# Altium PCB PCB1.PcbDoc
Units mil, origin at the board's own origin, x right, y up, seen from the top; angles counter-clockwise.
Board outline 1074.8 x 1117.49 mil, 4 copper layers (Top Layer 1, Top Layer, Bottom Layer, Bottom Layer 1), stack 23.756 mil thick; 53 components, 45 nets, 231 pads, 116 vias.
Unrouted connection lines stored in the file: 1.
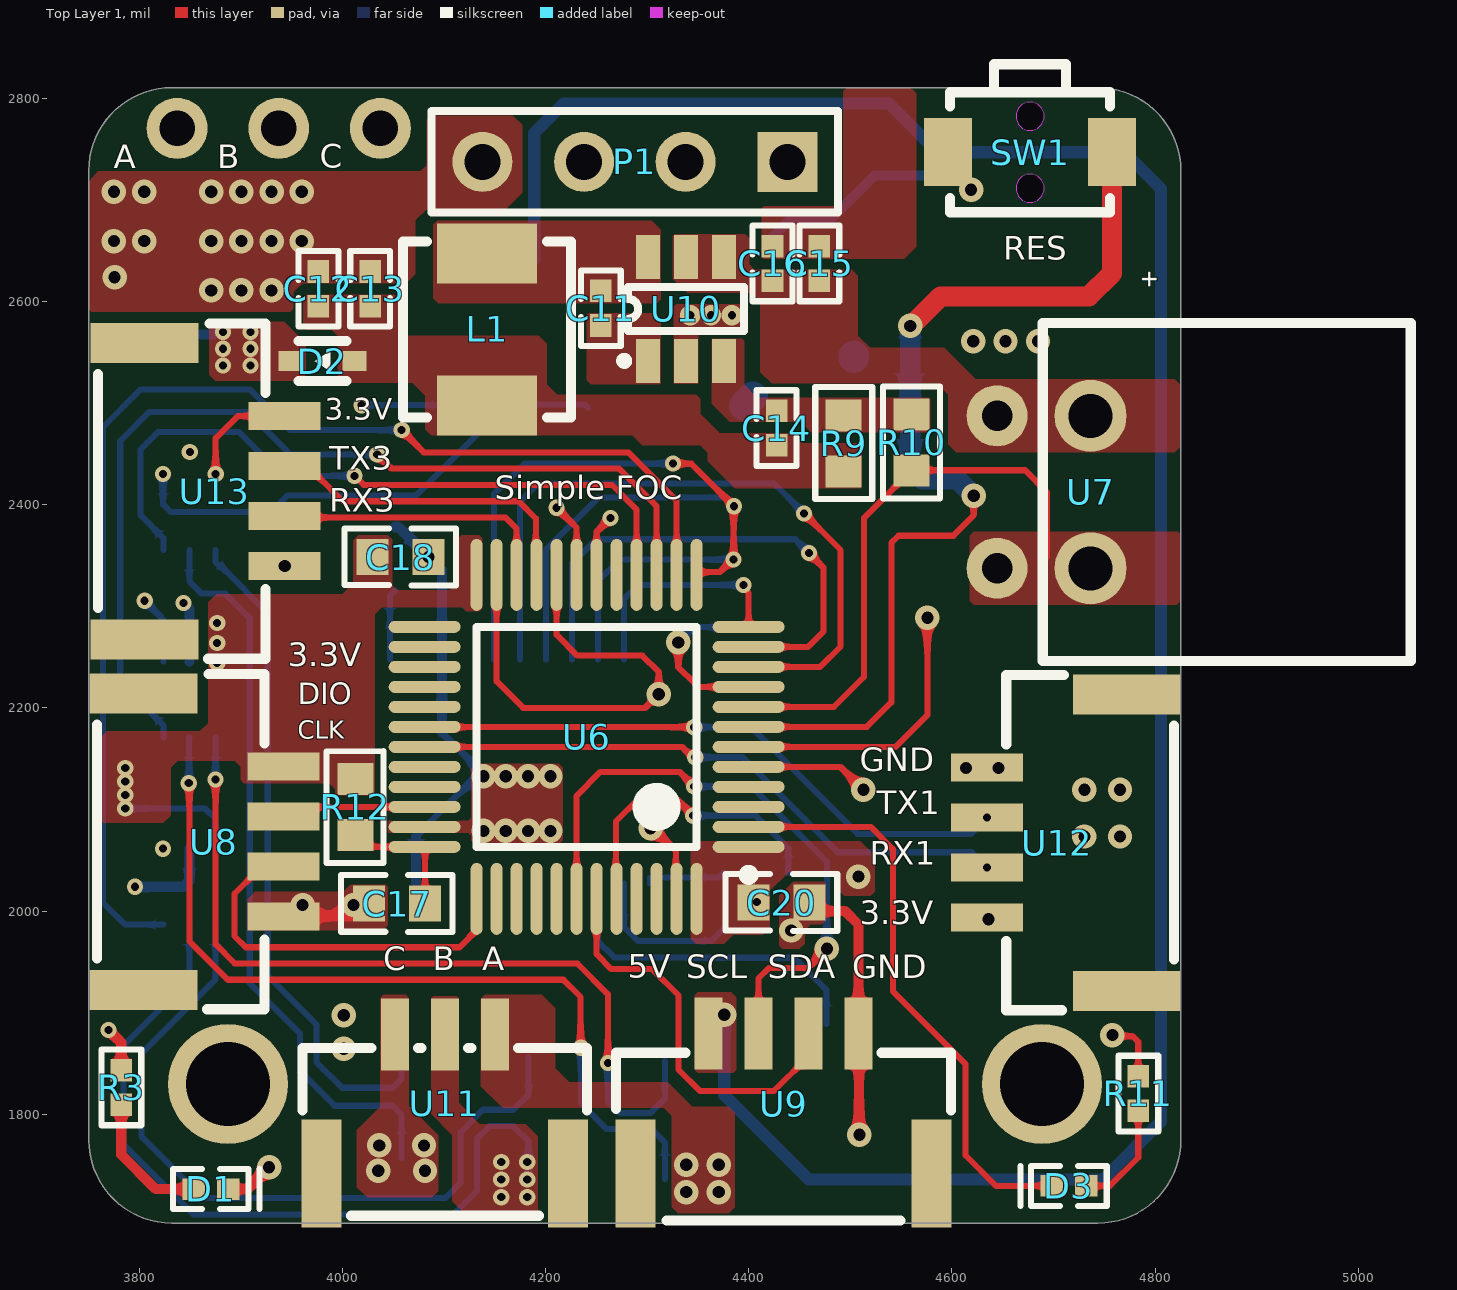
[diagram p0: Top Layer 1 view]
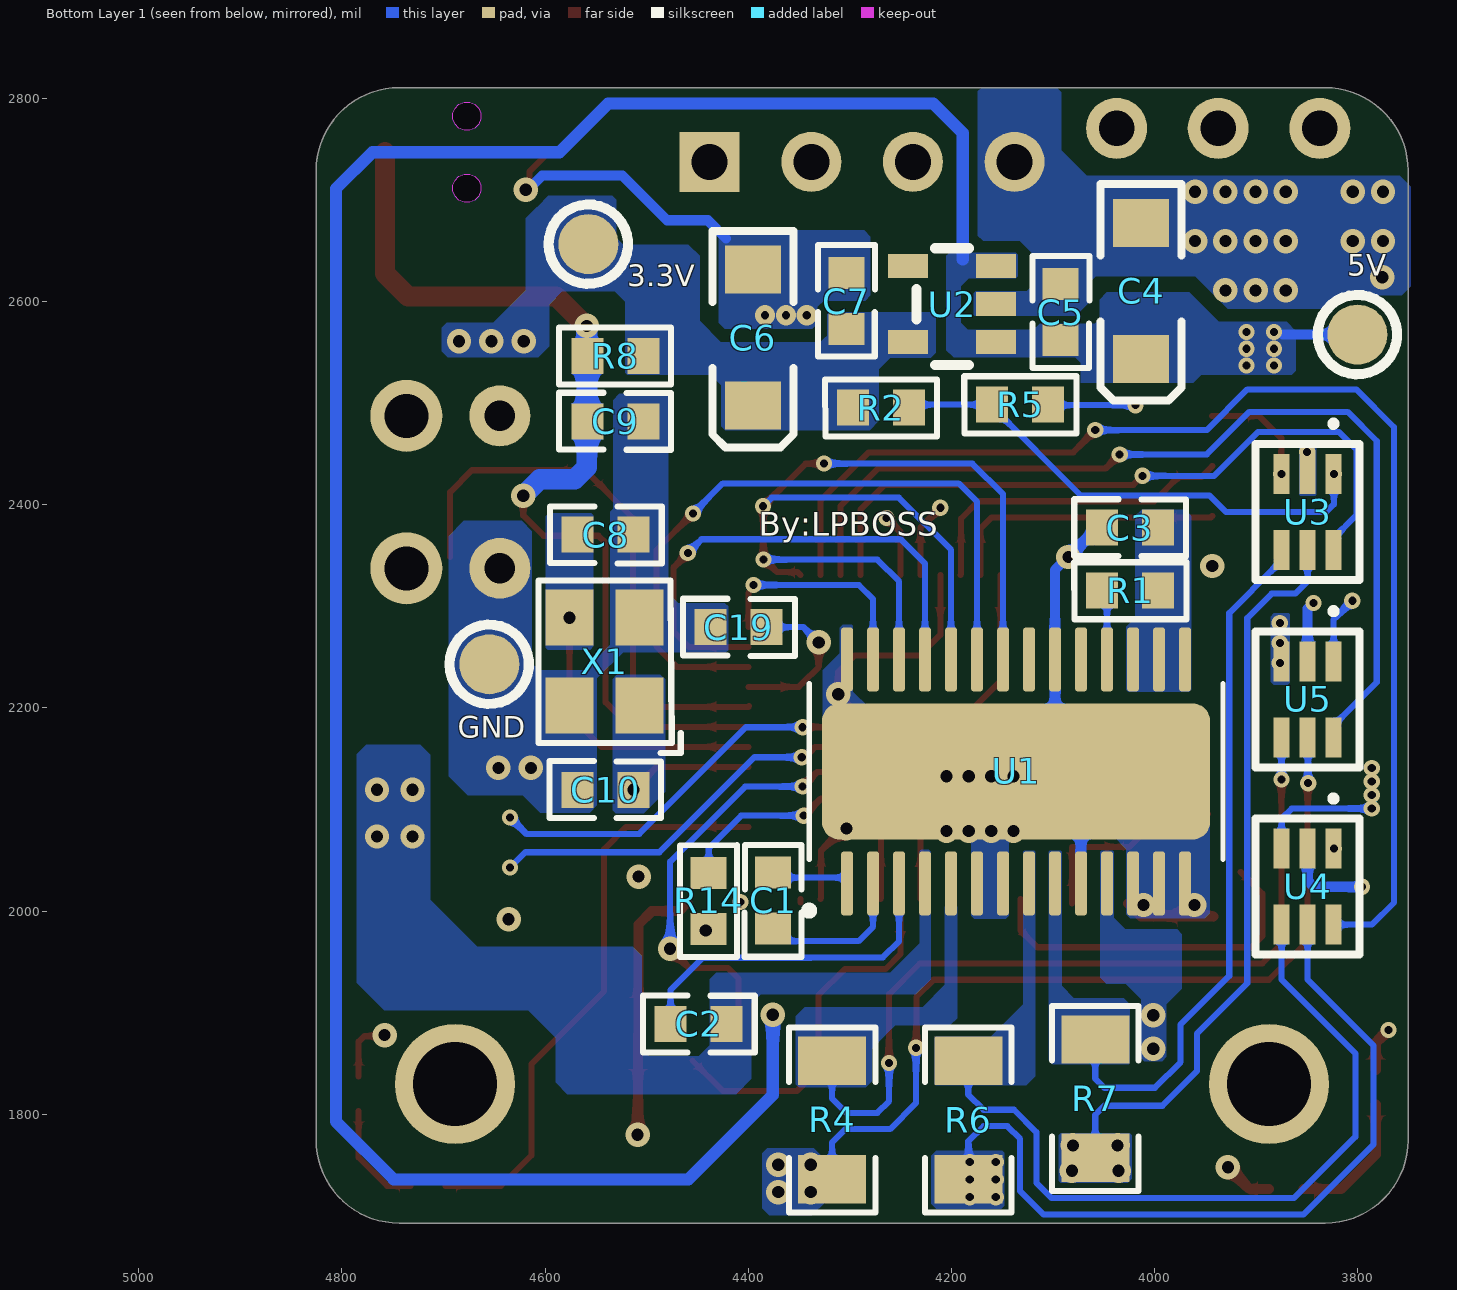
[diagram p1: Bottom Layer 1 view, seen from below]
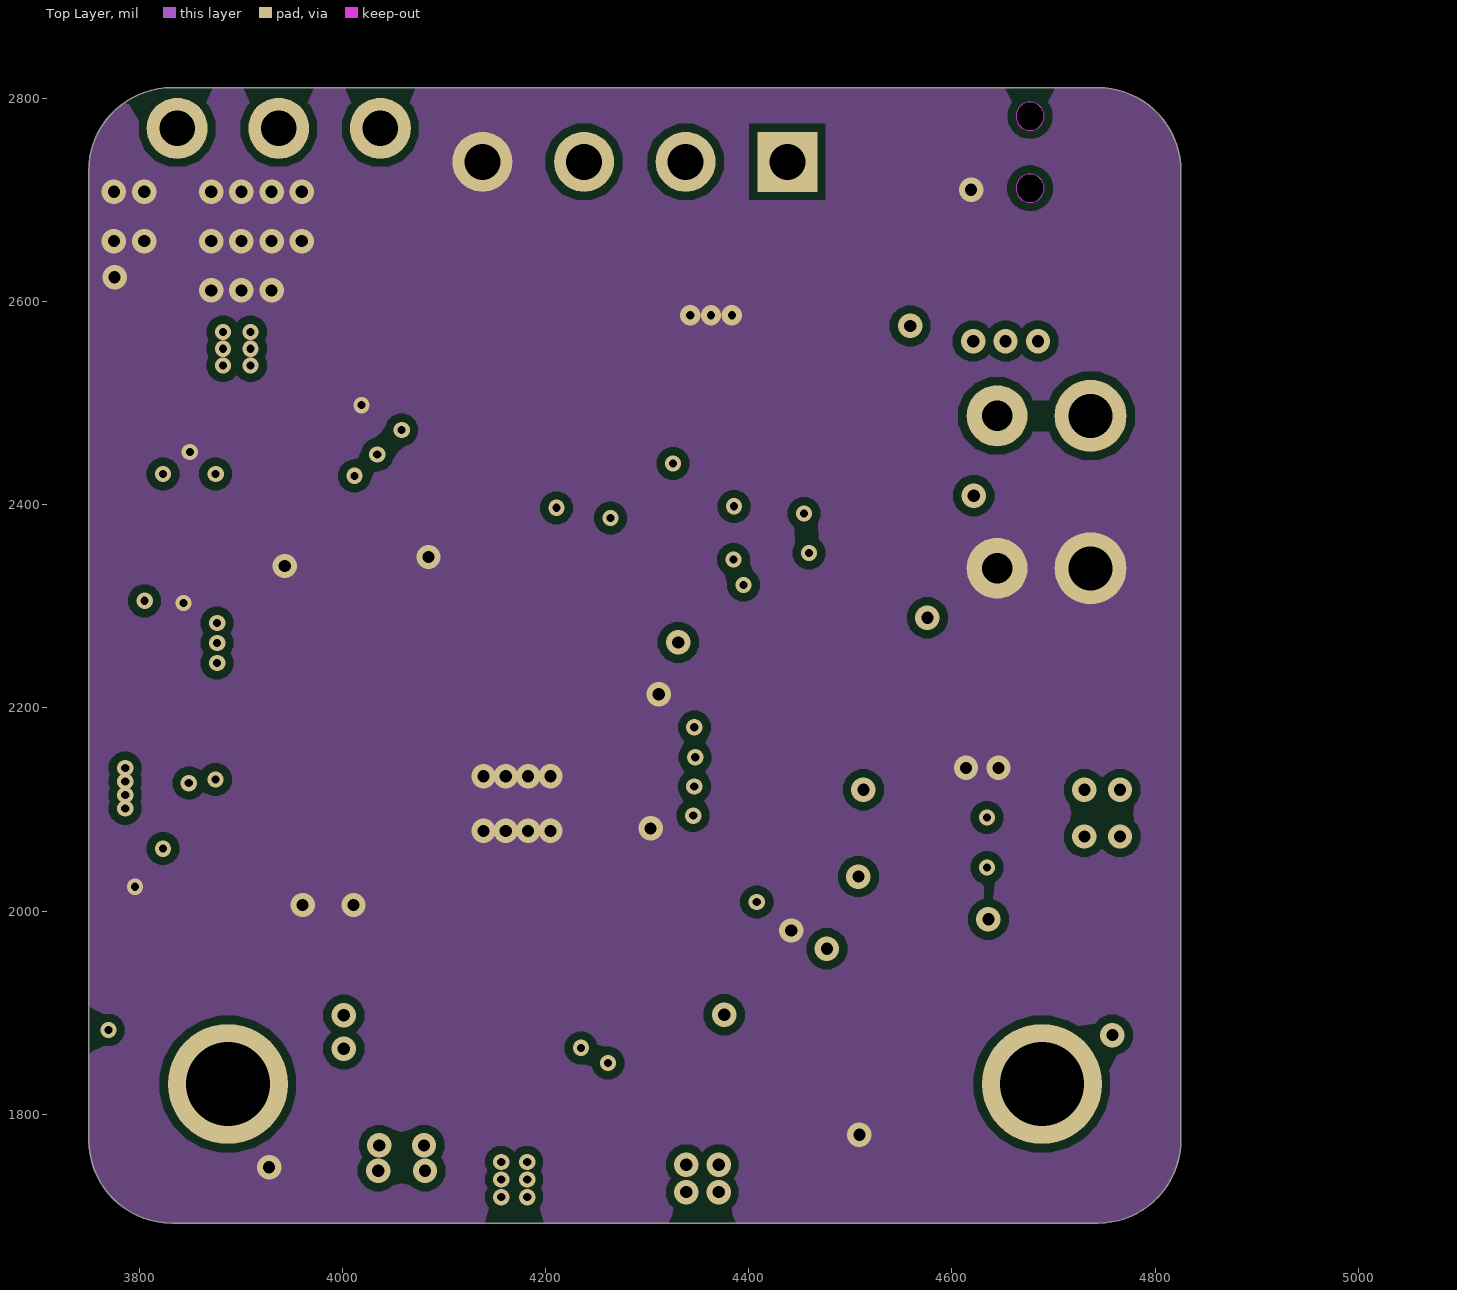
[diagram p2: Top Layer]
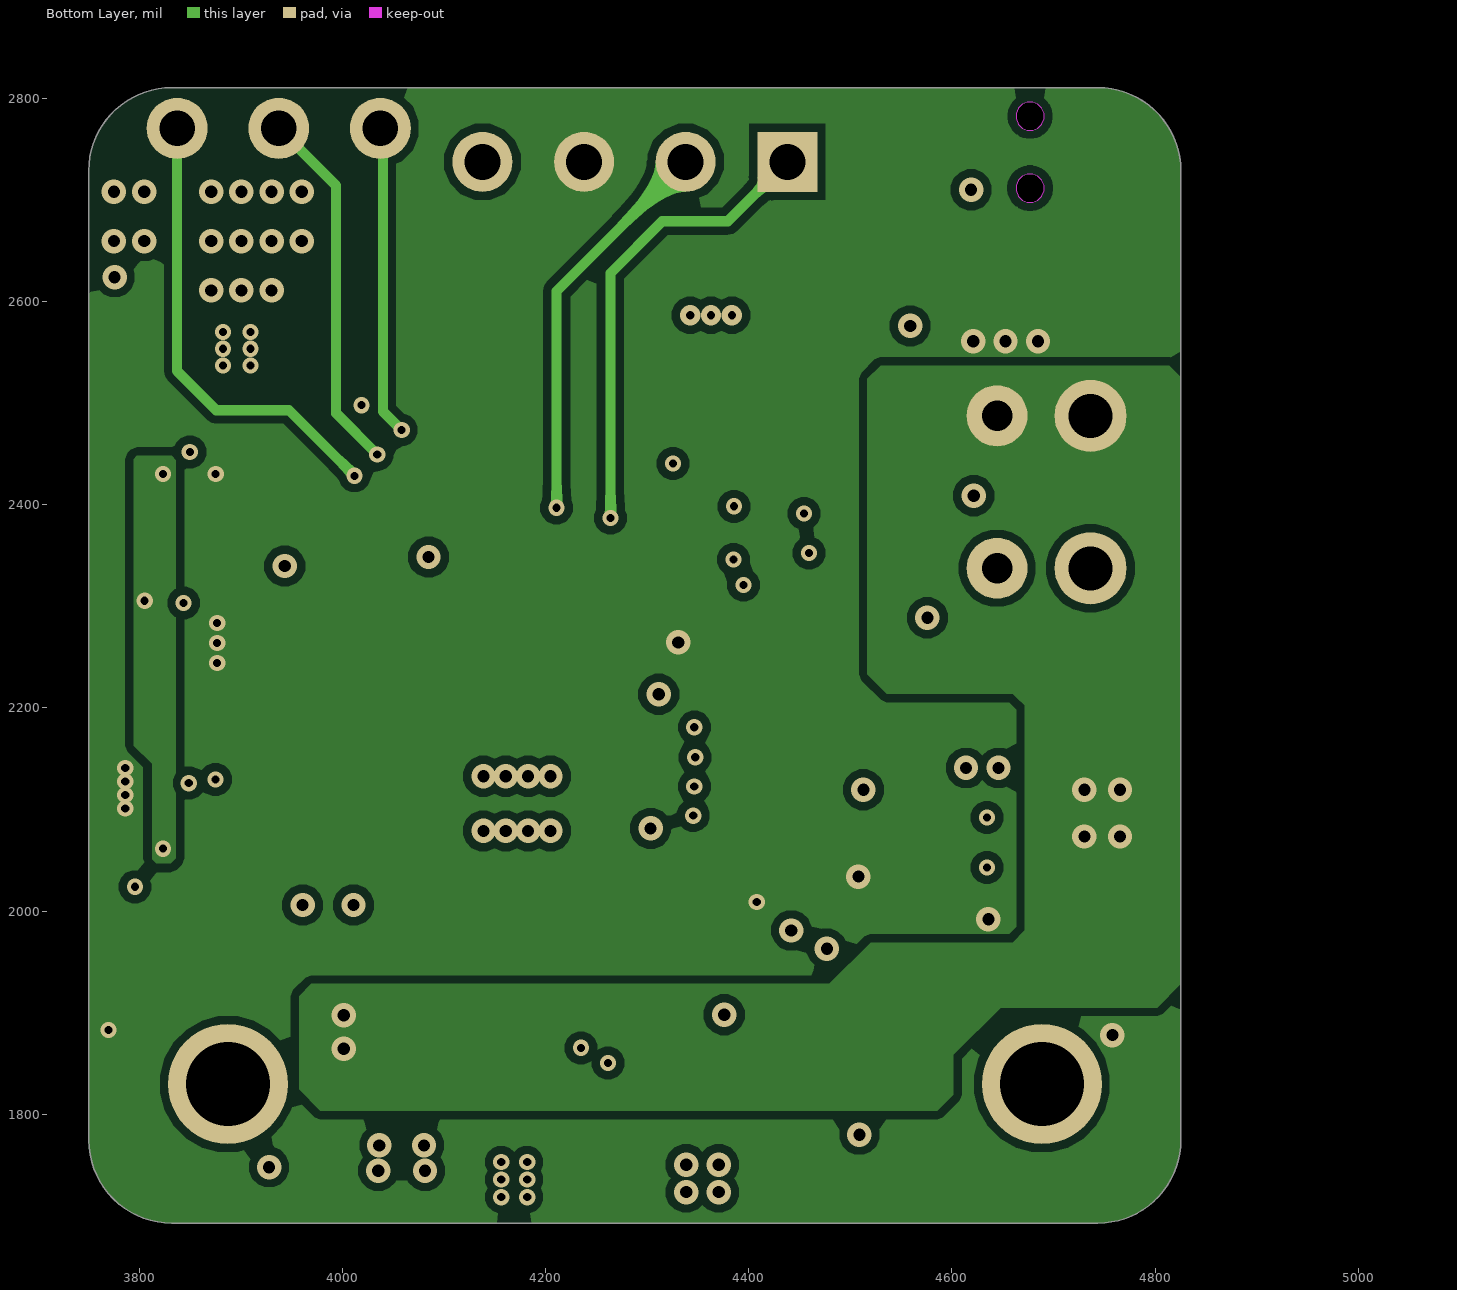
[diagram p3: Bottom Layer]

## Layer stack, top to bottom
Top Solder: solder mask 0.4, Solder Resist, Dk 3.5
Top Layer 1: signal copper 1.378
Dielectric 2: prepreg 2.8, PP-006, Dk 4.1
Top Layer: signal copper 1.4
Dielectric 1: dielectric 12.6, FR-4, Dk 4.8
Bottom Layer: signal copper 1.4
Dielectric 3: prepreg 2.8, PP-006, Dk 4.1
Bottom Layer 1: signal copper 1.378
Bottom Solder: solder mask 0.4, Solder Resist, Dk 3.5

## Board outline
3750.63,1774.69 3750.63,2728.77 cw(c3832.33,2728.77) 3832.33,2810.47 4743.72,2810.47 cw(c4743.72,2728.77) 4825.43,2728.77 4825.43,1774.69 cw(c4743.72,1774.69) 4743.72,1692.99 3832.33,1692.99 cw(c3832.33,1774.69)

## Design rules (kind name [scope] priority, off if disabled: settings)
Clearance [All] p1: gap=8 ignorepadtopadclearanceinfootprint=TRUE
ComponentClearance [All] p1: gap=0 collisioncheckmode=3 verticalgap=0 showdistances=FALSE
PlaneConnect [All] p1: planeconnectstyle=Direct reliefexpansion=20 reliefentries=4 reliefconductorwidth=10 reliefairgap=10
PolygonConnect [All] p1: connectstyle=Direct reliefconductorwidth=10 reliefentries=4 polygonreliefangle="90 Angle" airgapwidth=10
RoutingVias [All] p1: holewidth=28 width=50 viastyle="Through Hole" minholewidth=1 minwidth=1 maxholewidth=28 maxwidth=50
SolderMaskExpansion [All] p1: expansion=4 istentingtop=FALSE
Width [All] p1: maxlimit=100 minlimit=1 preferedwidth=6
28 further rules are at their usual default settings.

## Components (designator, comment, footprint, x,y, rotation, side; value= is the part's Value field where it differs from the comment)
C1 "10nf" C0603 4375.53,2010.47 r90 bottom
C2 "104" C0603 4449,1889 r0 bottom
C3 "0.47uf" C0603 4024.53,2377.47 r0 bottom
C4 "10uF" "CD A(3216)" 4013.53,2610.47 r90 bottom
C5 "104" C0603 4092.53,2589.47 r270 bottom
C6 "10uF" "CD A(3216)" 4395.53,2564.47 r90 bottom
C7 "104" C0603 4303.53,2600.47 r270 bottom
C8 "20pf" C0603 4540.53,2370.47 r0 bottom
C9 "104" C0603 4530.97,2482.03 r180 bottom
C10 "20pf" C0603 4540.53,2119.47 r180 bottom
C11 "104" C0402 4254.53,2593.51 r90 top
C12 "22UF" C0402 3976.53,2612.47 r270 top
C13 "104" C0402 4027.53,2612.47 r270 top
C14 "220pf" C0402 4427.53,2475.47 r270 top
C15 "104" C0402 4469.53,2637.47 r270 top
C16 "22uf" C0402 4423.53,2637.47 r270 top
C17 "104" C0603 4053.97,2007.47 r0 top
C18 "104" C0603 4057.41,2348.54 r0 top
C19 "104" C0603 4409.53,2279.47 r0 bottom
C20 "104" C0603 4432.53,2008.47 r0 top
D1 "LED" LED0402 3868.53,1730.47 r0 top
D2 "Diode" ESC_L1.2-W0.8-LS1.6-RD 3980.53,2541.47 r0 top
D3 "LED" LED0402 4717.53,1725.47 r180 top
L1 "3.3uH" "0402 TPC 4*4*2" 4142.53,2572.64 r90 top
P1 "Header 4" HDR1X4 4438.03,2737.47 r180 top
R1 "1K" R0603 4024.25,2315.47 r0 bottom
R2 "1K" R0603 4269.53,2495.47 r0 bottom
R3 "1K" R0402 3782.53,1826.47 r270 top
R4 "0.01" R1206 4317.53,1794.47 r90 bottom
R5 "1K" R0603 4132.53,2498.47 r0 bottom
R6 "0.01" R1206 4183.53,1794.47 r90 bottom
R7 "0.01" R1206 4058.53,1815.47 r90 bottom
R8 "10K" R0603 4530.97,2546.47 r180 bottom
R9 "73.2K" R0603 4493.53,2460.47 r270 top
R10 "10K" R0603 4560.53,2461.47 r90 top
R11 "1K" R0402 4783.53,1820.47 r270 top
R12 "0" R0603 4012.85,2102.58 r90 top
R14 "10K" R0603 4439,2010.14 r90 bottom
SW1 "Switch" SW-SMD_L3.9-W3.6-LS4.8-EH 4677,2747 r180 top
U1 "DRV8313PWP" HTSSOP-28 4136.53,2137.47 r90 bottom locked
U2 "RT9013-33" SOT-23-5_L2.9-W1.6-P0.95-LS2.8-BR 4199.53,2597.47 r180 bottom
U3 "INA199A1DCKR" SOT363 3849.53,2392.88 r270 bottom
U4 "INA199A1DCKR" SOT363 3849.53,2024.07 r270 bottom
U5 "INA199A1DCKR" SOT363 3849.53,2208.47 r270 bottom
U6 "STM32F103C8T6" 48P 4240.53,2171.47 r180 top locked
U7 "2EDGV-3.81卧式座" 2EDGV-3.81卧式座 4736.53,2412.47 r90 top locked
U8 "GH125-4P" CONN-SMD_4P-P1.27_GH125-S04DCA-00 3873.53,2068.47 r270 top locked
U9 "编码器" CONN-SMD_4P-P1.27_GH125-S04DCA-00 4434.35,1810.58 r0 top locked
U10 "RY8121" SOT-23-6 4338.57,2592.82 r90 top
U11 "GH125-3P" CONN-SMD_3P-P1.27_JS_GH125-S03CCA-00 4101.04,1810.18 r0 top locked
U12 "串口" CONN-SMD_4P-P1.27_GH125-S04DCA-00 4703.53,2067.47 r90 top
U13 "串口" CONN-SMD_4P-P1.27_GH125-S04DCA-00 3874.53,2413.47 r270 top
X1 "XTAL-4" OSC-SMD_4P-L3.2-W2.5-BL 4541.53,2245.47 r90 bottom

## Footprints (in the part's own frame and the unit in brackets; to place one, negate y for a bottom-side part, rotate by r counter-clockwise, add the part's x,y. Pads: shape width x height; smd on the part's side, far side on the other; paste and mask are expansions set on the pad)
2EDGV-3.81卧式座 [mm]
  round 1.8 hole 1.1 mask+0.051: 1(-1.905,0) 2(1.905,0)
  silkscreen extent -4.23,-8.01 4.23,1.19
48P [mm] "stm32f103"
  oval 1.8x0.3 smd: 1(-4.05,2.75) 2(-4.05,2.25) 3(-4.05,1.75) 4(-4.05,1.25) 5(-4.05,0.75) 6(-4.05,0.25) 7(-4.05,-0.25) 8(-4.05,-0.75) 9(-4.05,-1.25) 10(-4.05,-1.75) 11(-4.05,-2.25) 12(-4.05,-2.75) 25(4.05,-2.75) 26(4.05,-2.25) 27(4.05,-1.75) 28(4.05,-1.25) 29(4.05,-0.75) 30(4.05,-0.25) 31(4.05,0.25) 32(4.05,0.75) 33(4.05,1.25) 34(4.05,1.75) 35(4.05,2.25) 36(4.05,2.75)
  oval 0.3x1.8 smd: 13(-2.75,-4.05) 14(-2.25,-4.05) 15(-1.75,-4.05) 16(-1.25,-4.05) 17(-0.75,-4.05) 18(-0.25,-4.05) 19(0.25,-4.05) 20(0.75,-4.05) 21(1.25,-4.05) 22(1.75,-4.05) 23(2.25,-4.05) 24(2.75,-4.05) 37(2.75,4.05) 38(2.25,4.05) 39(1.75,4.05) 40(1.25,4.05) 41(0.75,4.05) 42(0.25,4.05) 43(-0.25,4.05) 44(-0.75,4.05) 45(-1.25,4.05) 46(-1.75,4.05) 47(-2.25,4.05) 48(-2.75,4.05)
  silkscreen extent -4.18,-2.75 2.75,3.57
"0402 TPC 4*4*2" [mm] "4.2mm x 4.4mm x 2mm 一体成型功率电感"
  rect 1.5x2.5 smd: 1(-1.9,0) 2(1.9,0)
  silkscreen extent -2.2,-2.1 2.2,2.1
C0402 [mm]
  rect 0.566x0.54 smd mask+0.051: 1(-0.433,0) 2(0.433,0)
  silkscreen extent -0.94,-0.5 0.94,0.5
C0603 [mm]
  rect 0.8x0.9 smd mask+0.051: 1(-0.7,0) 2(0.7,0)
  silkscreen extent -1.41,-0.71 1.39,0.72
"CD A(3216)" [mm] "常用:钽电容"
  rect 1.2x1.4 smd: 1(-1.7,0) 2(1.7,0)
  silkscreen extent -2.74,-1.02 2.67,1.02, body extent -1.6,-0.8 1.6,0.8, height 1.6
CONN-SMD_3P-P1.27_JS_GH125-S03CCA-00 [mm]
  rect 0.7x1.8 smd paste+0 mask+0.05: 1(-1.25,1.74) 2(0,1.74) 3(1.25,1.74)
  rect 1x2.7 smd paste+0 mask+0.05: 4(3.08,-1.74) 5(-3.08,-1.74)
  silkscreen extent -3.56,-2.79 3.56,1.4
CONN-SMD_4P-P1.27_GH125-S04DCA-00 [mm] "P4"
  rect 0.7x1.8 smd mask+0.05: 1(-1.875,1.75) 2(-0.625,1.75) 3(0.625,1.75) 4(1.875,1.75)
  rect 1x2.7 smd mask+0.05: 5(3.705,-1.75) 6(-3.705,-1.75)
  silkscreen extent -4.19,-2.92 4.19,1.27
ESC_L1.2-W0.8-LS1.6-RD [mil]
  rect 23.6x19.7 smd mask+2: 1(-31.5,0) 2(31.5,0)
  silkscreen extent -24,-20 24,20
HDR1X4 [mm] "Connector; Header; 4 Position"
  rect 1.5x1.5 hole 0.9: 1(0,0)
  round 1.5 hole 0.9: 2(2.54,0) 3(5.08,0) 4(7.62,0)
  silkscreen extent -1.27,-1.27 8.89,1.27, body extent -1.27,-1.27 8.89,1.27, height 5.94
HTSSOP-28 [mm]
  rrect50% 1.6x0.3 smd paste-2 mask+0: 1(-2.8,4.225) 2(-2.8,3.575) 3(-2.8,2.925) 4(-2.8,2.275) 5(-2.8,1.625) 6(-2.8,0.975) 7(-2.8,0.325) 8(-2.8,-0.325) 9(-2.8,-0.975) 10(-2.8,-1.625) 11(-2.8,-2.275) 12(-2.8,-2.925) 13(-2.8,-3.575) 14(-2.8,-4.225) 15(2.8,-4.225) 16(2.8,-3.575) 17(2.8,-2.925) 18(2.8,-2.275) 19(2.8,-1.625) 20(2.8,-0.975) 21(2.8,-0.325) 22(2.8,0.325) 23(2.8,0.975) 24(2.8,1.625) 25(2.8,2.275) 26(2.8,2.925) 27(2.8,3.575) 28(2.8,4.225)
  rrect25% 3.4x9.7 smd paste-6 mask+0: 29(0,0)
  silkscreen extent -3.58,-5.17 2.2,5.27
LED0402 [mm]
  rect 0.566x0.54 smd mask+0.051: A(-0.376,-0.104) N(0.49,-0.104)
  silkscreen extent -0.89,-0.6 1.27,0.39
OSC-SMD_4P-L3.2-W2.5-BL [mm] "贴片晶振"
  rect 1.4x1.2 smd: 1(-1.1,-0.875) 2(1.1,-0.875) 3(1.1,0.875) 4(-1.1,0.875)
  silkscreen extent -2.29,-1.9 2.03,1.65
R0402 [mm]
  rect 0.566x0.54 smd mask+0.051: 1(-0.433,0) 2(0.433,0)
  silkscreen extent -0.94,-0.5 0.94,0.5
R0603 [mm]
  rect 0.8x0.9 smd mask+0.051: 1(-0.7,0) 2(0.7,0)
  silkscreen extent -1.41,-0.71 1.4,0.72
R1206 [mil]
  rect 47.54x66.97 smd paste-3937.01 mask+2: 1(-58.22,0) 2(58.22,0)
  silkscreen extent -91,-42 91,42
SOT363 [mm]
  rect 1x0.4 smd: 1(-0.95,0.65) 2(-0.95,0) 3(-0.95,-0.65) 4(0.95,-0.65) 5(0.95,0) 6(0.95,0.65)
  silkscreen extent -2.23,-1.3 1.7,1.3
SOT-23-5_L2.9-W1.6-P0.95-LS2.8-BR [mil]
  rect 39.4x23.6 smd mask+1.97: 1(43.3,-37.4) 2(43.3,0) 3(43.3,37.4) 4(-43.3,37.4) 5(-43.3,-37.4)
  silkscreen extent -35,-60 17,55
SOT-23-6 [mm] "SOT23, 6-Leads, Body 2.90x2.80mm, Pitch 0.95mm, IPC Medium Density"
  rect 1.1x0.6 smd: 1(-1.3,0.95) 2(-1.3,0) 3(-1.3,-0.95) 4(1.3,-0.95) 5(1.3,0) 6(1.3,0.95)
  silkscreen extent -1.37,-1.45 0.55,1.62
SW-SMD_L3.9-W3.6-LS4.8-EH [mm]
  rect 1.2x1.7 smd: 1(-2.05,0) 2(2.05,0)
  Keep-Out Layer board cut-out: 0.35,-0.9 0.35,-0.83 0.297,-0.702 0.198,-0.603 0.07,-0.55 -0.07,-0.55 -0.198,-0.603 -0.297,-0.702 -0.35,-0.83 -0.35,-0.9 -0.35,-0.97 -0.297,-1.098 -0.198,-1.197 -0.07,-1.25 0.07,-1.25 0.198,-1.197 0.297,-1.098 0.35,-0.97 0.35,-0.9 0.35,-0.9
  Keep-Out Layer board cut-out: 0.35,0.9 0.35,0.97 0.297,1.098 0.198,1.197 0.07,1.25 -0.07,1.25 -0.198,1.197 -0.297,1.098 -0.35,0.97 -0.35,0.9 -0.35,0.83 -0.297,0.702 -0.198,0.603 -0.07,0.55 0.07,0.55 0.198,0.603 0.297,0.702 0.35,0.83 0.35,0.9 0.35,0.9
  silkscreen extent -2,-2.2 2,1.5

## Part data
C1 C2 C3 C5 C7 C8 C9 C10 C11 C12 C13 C14 C15 C16 C17 C18 C19 C20: library part C, "无极性电容", BOM名称=无极性贴片电容, 学习资源=www.ooocke.com, 版权归属=源创客
C4 C6: library part CAP+, "电解电容 10uf  贴片型 钽电容的正极是实物有线的一段", BOM_JLCPCB Part Class="Extended Part", BOM_Manufacturer=ROQANG, BOM_Manufacturer Part=RVT1V100M0405, BOM_Supplier=LCSC, BOM_Supplier Part=C72485, nameAlias=Capacitance, spicePre=C, spiceSymbolName=RVT1V100M0405-C72485
D2: library part 二极管, "Diode 1N series"
L1: library part L, "电感", BOM名称=小功率贴片电感, 学习资源=www.ooocke.com, 版权归属=源创客
P1: "Header, 4-Pin", LatestRevisionDate=17-Jul-2002, LatestRevisionNote="Re-released for DXP Platform.", Publisher="Altium Limited"
R1 R2 R3 R4 R5 R6 R7 R8 R9 R10 R11 R12 R14: library part R, "电阻", BOM名称=贴片电阻, 学习资源=www.ooocke.com, 版权归属=源创客
SW1: "SWITCH"
U1: "65-V max, 3-A peak 3-phase motor driver 28-HTSSOP -40 to 125", Package="HTSSOP-28 Texas Instruments", Availability=Good, MF="Texas Instruments", MP=DRV8313PWP, Price=None, Purchase-URL=https://pricing.snapeda.com/search/part/DRV8313PWP/?ref=eda, SnapEDA_Link=https://www.snapeda.com/parts/DRV8313PWP/Texas%20Instruments/view-part/287728/?ref=snap
U2: "3.3V降压 500mA 最大输入5.5V"
U9 U12 U13: library part GH125-4P
U10: "18V 2A 1MHz Synchronous Step-Down Regulator"
X1: "贴片晶振"

## Free pads (board coordinates)
  round 59.06 smd far side mask+2: 0(3800.53,2567.47) 0(4557.53,2656.47) 0(4655,2243)
  round 118.11 hole 82.68: 2(3887.42,1829.78) 2(4688.63,1829.78)
  round 60 hole 35: 3(3837.53,2770.47) 3(3937.53,2770.47) 3(4037.53,2770.47)
  round 60 hole 30: 4(4644.53,2487.47) 5(4644.53,2337.47)

## Via types
v1: diameter 24, hole 12, Top Layer 1 to Bottom Layer 1, tented both sides, 63 vias
v2: diameter 16, hole 8, Top Layer 1 to Bottom Layer 1, tented both sides, 50 vias
v3: diameter 20, hole 8, Top Layer 1 to Bottom Layer 1, tented both sides, 3 vias

## Nets (pads, with @x,y where several pads share a name; then routed paths per layer and width w, separated by ;. In a path a pad name is that pad's centre, name@x,y a point inside that pad or via, vN(x,y) a via of type N, cw(c..) or ccw(c..) an arc to the next point about the centre after c; other vN are vias at no path point)
3.3V: C6.1 C7.2 C18.1 C19.1 C20.1 P1.3 pad.0@4557.53,2656.47 R2.2 R3.1 R8.2 R11.1 R12.2 U2.5 U3.3 U4.3 U5.3 U6.1 U6.9 U6.24 U6.48 U8.1 U12.1 U13.1 | length 539.5
  Top Layer 1 w6: v2(3875.4,2430.28) 3875.4,2465.4 3897.29,2487.29 U13.1 ; v1(4330.77,2264.47) 4330.77,2240.23 4346.8,2224.2 4350.31,2220.69 U6.9 ; U6.48@4348.79,2008.47 U6.48 ; U12.1 4636,1992.28 v1(4636,1992) ; v1(4758,1878) 4759,1877 4778,1877 4783.53,1871.47 R11.1
  Top Layer 1 w10: v2(3770,1883) 3782.53,1870.47 R3.1
  Bottom Layer 1 w6: v2@3784,2101 3784.5,2101.5 3784.5,2110.5 3785,2111 3785,2108.29 3788.87,2104.42 v2@3788.87,2104 ; v2(3786.41,2101) 3865.35,2101 3875.12,2091.24 U4.3 ; v1(4330.77,2264.47) 4345.77,2279.47 C19.1
  Bottom Layer 1 w30: C6.1 C6.1@4404.15,2506.17 ; R8.2@4503.41,2544.51 R8.2
  other v1: 4508,2034 4621,2561 4652.89,2561 4684.77,2561
  other v2: 4408,2009 3786.41,2114.33 3786.41,2127.67 3786.41,2141 3876.88,2244.32 3876.88,2263.94 3876.88,2283.56
5V: C4.1 C5.2 D2.1 pad.0@3800.53,2567.47 U2.1 U2.3 U9.1 | length 2346.7
  Bottom Layer 1 w10: pad.0@3800.53,2567.47 3873.75,2567.47
  Bottom Layer 1 w12: 4189,2641.28 4189,2765.97 4218.03,2795 4538,2795 4586,2747 4770,2747 4806,2711 4806,1793 4749,1736 4459,1736 4375.96,1819.04 v1(4375.96,1898)
  other v2: 3882.61,2537 3909.61,2537 3882.61,2553.54 3909.61,2553.54 3882.61,2570.08 3909.61,2570.08
+1.65V: R2.1 R5.2 U3.1 U4.1 U5.1 | length 564.9
  Bottom Layer 1 w5.98: 3823.65,2400.35 v2(3823.65,2430.28)
  Bottom Layer 1 w6: v2(3805.53,2305.47) 3823.94,2287.06 U5.1 ; 3823.65,2400.35 3831,2393 3930,2393 3946,2409 4072.58,2409 4160.09,2496.5 R5.2 4238.97,2498.47 R2.1 ; v2(3823.65,2430.28) U3.1
  other v2: 3823.65,2061.47
CS1: pad.3@3837.53,2770.47 U3.6 U6.16 | length 1155.8
  Top Layer 1 w6: v2(4012.17,2428.45) 4021.15,2419.47 4265.53,2419.47 4289.74,2395.26 U6.16
  Bottom Layer w10: pad.3@3837.53,2770.47 3837.53,2531.47 3876,2493 3947.62,2493 v2(4012.17,2428.45)
  Bottom Layer 1 w6: U3.6 3823.94,2367.28 3801.53,2389.69 3801.53,2454.47 3818.53,2471.47 3898.53,2471.47 3941.55,2428.45 v2(4012.17,2428.45)
CS2: pad.3@4037.53,2770.47 U4.6 U6.14 | length 1540.6
  Top Layer 1 w6: v2(4058.53,2473.47) 4058.53,2473.18 4080.23,2451.47 4281.53,2451.47 4329.11,2403.89 U6.14
  Bottom Layer w10: pad.3@4037.53,2770.47 4040,2768 4040,2492 v2(4058.53,2473.47)
  Bottom Layer 1 w6: U4.6 3786.33,1986.67 3764.53,2008.47 3764.53,2476.47 3801.53,2513.47 3908.85,2513.47 3948.85,2473.47 v2(4058.53,2473.47)
CS3: pad.3@3937.53,2770.47 U5.6 U6.15 | length 1316.4
  Top Layer 1 w6: v2(4034.53,2449.47) 4048.53,2435.47 4272.53,2435.47 4309.42,2398.58 U6.15
  Bottom Layer w10: pad.3@3937.53,2770.47 3994,2714 3994,2490 v2(4034.53,2449.47)
  Bottom Layer 1 w6: U5.6 3823.94,2182.88 3781.53,2225.29 3781.53,2462.76 3810.24,2491.47 3906.81,2491.47 3948.81,2449.47 v2(4034.53,2449.47)
DRV_EN: U1.22 U1.24 U1.26 U6.13 | length 1060.6
  Top Layer 1 w6: v2(4325.53,2440.47) 4343.53,2440.47 v2(4385.53,2398.47) 4385.26,2398.21 4385.26,2346.26 v2(4385,2346) 4384.01,2346 4371.62,2333.61 4351.48,2333.61 U6.13
  Bottom Layer 1 w6: U1.22 4149.32,2410.32 4179.47,2440.47 v2(4325.53,2440.47) ; U1.24 4200.5,2355.5 4252,2407 4377,2407 v2(4385.53,2398.47) ; U1.26 4251.68,2324.63 4273.05,2346 v2(4385,2346)
GND: C3.2 C4.2 C5.1 C6.2 C7.1 C8.1 C9.2 C10.1 C12.1 C13.1 C15.1 C16.1 C17.1 C18.2 C19.2 C20.2 D1.N P1.4 pad.0@4655,2243 pad.5 R5.1 R10.1 R14.1 SW1.2 U1.6 U1.7 U1.10 U1.12 U1.13 U1.14 U1.20 U1.28 U1.29 U2.2 U3.2 U4.2 U5.2 U6.8 U6.20 U6.23 U6.35 U6.47 U7.1 U8.4 U9.4 U10.2 U12.4 U13.4 X1.2 X1.4 | length 2470.7
  Top Layer 1 w6: U6.23 4151.94,2226.06 4178,2200 4298.07,2200 v1(4311.53,2213.46) 4311.53,2235.47 4295.53,2251.47 4231.53,2251.47 4211,2272 U6.20 ; v1(4303.53,2081.47) 4306.53,2081.47 4328.33,2059.67 4328.33,2012.8 U6.47 ; U6.8@4399.2,2201.78 U6.8 4484.05,2201 4513.53,2230.47 4513.53,2386.91 R10.1 4672.09,2433.91 4693.53,2412.47 4693.53,2348.47 ; SW1.2 4615.56,2727.73 4615.56,2718.31 4619,2714.87 v1(4619,2710)
  Top Layer 1 w10: D1.N 3906.38,1726.38 v1(3928,1748) ; v1(3961,2006) 3949.65,1994.65 U8.4 4013.59,1994.65 C17.1 ; C20.2 4468.56,2000 4495,2000 4508.17,1986.83 U9.4 4508.58,1879.06 4508.58,1780.42 v1(4509,1780)
  Bottom Layer 1 w6: v2(4019,2498) 4110,2498 R5.1@4111,2499 ; U1.29@4072.55,2073.5 U1.29 U1.29@4098.14,2175.86
  Bottom Layer 1 w10: v2(3796,2024) 3843.67,2024 3849.53,2029.86 U4.2 ; v2(3843.84,2303.29) 3849.53,2297.6 U5.2 ; C3.2 4052.09,2378.47 4055.01,2378.47 v1(4084.97,2348.54) ; U1.10 U1.29@4072.55,2073.5 ; v1@4086,2348 4098.14,2335.86 U1.20 U1.29@4098.14,2175.86 ; 4422,2662 4440,2680 4480,2680 4524,2724 4603,2724 v1@4619,2708
  other v1: 4442,1981 4011.12,2006 4139,2079 4161,2079 4183,2079 4205,2079 4139,2132.75 4161,2132.75 4183,2132.75 4205,2132.75 4614,2141 4646,2141 3943.42,2339.65 3871,2611 3900.75,2611 3930.5,2611 3776,2624 3775.31,2659.5 3805.06,2659.5 3871,2659.5 3900.75,2659.5 3930.5,2659.5 3960.25,2659.5 3775.31,2708 3805.06,2708 3871,2708 3900.75,2708 3930.5,2708 3960.25,2708
  other v2: 3850,2452
  other v3: 4342.53,2586.47 4363.03,2586.47 4383.53,2586.47
LED: D3.N U6.2 | length 579.4
  Top Layer 1 w6: U6.2 4520.22,2082.89 4542,2061.11 4542,1921 4613.53,1849.47 4613.53,1759.47 4643.44,1729.56 D3.N
NetC1_1: C1.1 U1.2 | length 151.8
  Bottom Layer 1 w6: U1.2 4277.27,1984.73 4291.53,1970.47 4363.09,1970.47 C1.1
NetC1_2: C1.2 U1.1 | length 80.5
  Bottom Layer 1 w6: U1.1 4302.97,2027.34 4302.97,2033.03 4370.53,2033.03 C1.2
NetC2_2: C2.2 U1.3 | length 335.1
  Bottom Layer 1 w6: U1.3 4251.68,1970.32 4267.53,1954.47 4338.12,1954.47 4338.43,1954.17 4444.83,1954.17 4476.56,1922.44 C2.2
NetC11_1: C11.1 U10.1
NetC11_2: C11.2 L1.2 U10.6
NetC12_2: C12.2 C13.2 C14.2 D2.2 L1.1 R9.2
NetC14_1: C14.1 R9.1 R10.2 U10.3
NetC17_2: C17.2 R12.1 U6.36 | length 129
  Top Layer 1 w6: R12.1 4024.66,2063.21 U6.36 4081.53,2062.76 C17.2
NetD1_A: D1.A R3.2 | length 134.3
  Top Layer 1 w10: R3.2 3782.53,1760.47 3816.62,1726.38 D1.A
NetD3_A: D3.A R11.2 | length 108.7
  Top Layer 1 w6: D3.A 4755.56,1729.56 4783.53,1757.53 R11.2
NetR1_2: R1.2 U1.18 | length 69.8
  Bottom Layer 1 w6: U1.18 4046.96,2310.62 R1.2
NetR14_2: R14.2 U6.44 | length 300.1
  Top Layer 1 w6: U6.44 4269.27,2012.8 4269.27,2088.22 4291.84,2110.79 4328.68,2110.79 v2(4345.47,2094)
  Bottom Layer 1 w6: v2(4345.47,2094) 4407,2094 4439,2062 R14.2
OLED_SCL: P1.2 U6.19 | length 467.3
  Top Layer 1 w6: v2(4211,2397) 4230.68,2377.32 U6.19
  Bottom Layer w10: v2(4211,2397) 4211,2610.45 P1.2
OLED_SDA: P1.1 U6.18 | length 522
  Top Layer 1 w6: U6.18 4250.37,2373.37 v2(4264,2387)
  Bottom Layer w10: v2@4264,2387.05 4264,2565 4264,2628 4315,2679 4379.55,2679 P1.1
OSCIN: C10.2 U6.5 X1.1 | length 122.3
  Top Layer 1 w6: U6.5 4490.49,2141.95 v1(4512.97,2119.47)
OSCOUT: C8.2 U6.6 X1.3 | length 284.8
  Top Layer 1 w6: U6.6 4544.68,2161.63 4575.98,2192.93 v1(4575.98,2288.78)
OUT1: R4.1 U5.5 U11.3 | length 849.6
  Top Layer 1 w6: v2(3849,2126) 3849.53,2125.47 3849.53,1970.47 3887.53,1932.47 4217.67,1932.47 4234.53,1915.62 v2@4234.53,1863.93
  Bottom Layer 1 w6: v2(3849,2126) 3849.26,2126.26 3849.26,2170.81 U5.5 ; v2(4235.01,1865.47) 4235.01,1810.99 4260.53,1785.47 4304.53,1785.47 4317.53,1772.47 R4.1
  other v1: 4338.53,1723.47 4370.53,1723.47 4338.53,1750.47 4370.53,1750.47
OUT1_CS: R4.2 U1.5 U5.4 | length 820
  Top Layer 1 w6: v2(3875.35,2129.47) 3875.35,1967.27 3894.15,1948.47 4231.37,1948.47 4261.53,1918.32 v2@4261.53,1849.83
  Bottom Layer 1 w6: U5.4 3875.24,2170.95 3875.24,2129.59 v2(3875.35,2129.47) ; v2(4261.53,1850.47) 4261.53,1813.1 4273.15,1801.47 4303.53,1801.47 4317.53,1815.47 R4.2
OUT2: R6.1 U4.5 U11.2 | length 780.3
  Bottom Layer 1 w6: U4.5 3849.53,1932.53 3784.53,1867.53 3784.53,1770.47 3853.53,1701.47 4109.53,1701.47 4132.53,1724.47 4132.53,1775.85 4145.15,1788.47 4168.53,1788.47 4183.53,1773.47 R6.1
  other v2: 4156.5,1718.47 4182.06,1718.47 4156.5,1735.78 4182.06,1735.78 4156.5,1753.09 4182.06,1753.09
OUT2_CS: R6.2 U1.8 U4.4 | length 753.5
  Bottom Layer 1 w6: U4.4 3875.12,1932.66 3802.53,1860.07 3802.53,1777.93 3862.98,1717.47 4101.53,1717.47 4116.53,1732.47 4116.53,1782.47 4138.53,1804.47 4168.53,1804.47 4183.53,1819.47 R6.2@4183.53,1856.54
OUT3: R7.1 U3.5 U11.1 | length 731.9
  Bottom Layer 1 w6: U3.5 3849.53,2324.47 3861.53,2312.47 3884.9,2312.47 3909,2288.37 3909,1929 3958.53,1879.47 3958.53,1842.47 3992.53,1808.47 4049.53,1808.47 4058.53,1799.47 R7.1
  other v1: 4035.53,1744.47 4081.53,1744.47 4036.53,1769.47 4080.53,1769.47
OUT3_CS: R7.2 U1.9 U3.4 | length 682.7
  Bottom Layer 1 w6: U3.4 3875.12,2343.66 3879.99,2338.79 3881.21,2338.79 3926.68,2293.32 3926.68,1936.32 3974.53,1888.47 3974.53,1851.47 3999.85,1826.15 4049.53,1826.15 4058.53,1835.15 R7.2
PWM_A: U1.27 U6.12 | length 226.1
  Top Layer 1 w6: v2(4395,2321) 4395,2318.29 4399.98,2313.32 U6.12
  Bottom Layer 1 w6: U1.27 4277.27,2306.96 4291.32,2321 v2(4395,2321)
PWM_B: U1.25 U6.11 | length 506.2
  Top Layer 1 w6: U6.11 4458.48,2260.06 4473.53,2275.1 4473.53,2338.19 4459.53,2352.19 v2(4459.53,2352.47)
  Bottom Layer 1 w6: U1.25 4226.09,2342.04 4250.05,2366 4446,2366 v2(4459.53,2352.47)
PWM_C: U1.23 U6.10 | length 699.3
  Top Layer 1 w6: U6.10 4470.42,2240.37 4490.53,2260.47 4490.53,2355.47 v2(4454.53,2391.47)
  Bottom Layer 1 w6: U1.23 4174.91,2402.91 4193,2421 4425,2421 v2(4454.53,2391.47)
RES: C9.1 R8.1 SW1.1 U6.7 | length 971.9
  Top Layer 1 w6: U6.7 4516.37,2181.32 4540.53,2205.47 4540.53,2362.47 4547.53,2369.47 4601.53,2369.47 4621.53,2389.47 v1(4621.53,2408.91)
  Top Layer 1 w20: v1(4559,2576) 4560.08,2576 4589.08,2605 4735,2605 4757.71,2627.71 SW1.1
  Bottom Layer 1 w20: v1(4559,2576) 4559,2436.72 4570.72,2425 4605.44,2425 v1(4621.53,2408.91)
Sensor_SCL: U6.42 U9.2 | length 613.5
  Top Layer 1 w6: U6.42 4230.68,2113.52 4254.17,2137 4332.17,2137 v2(4346.55,2122.62) ; U9.2 4409.74,1933.74 4420,1944 4458,1944 v1(4477,1963)
  Bottom Layer 1 w6: v2(4346.55,2122.62) 4403.1,2122.62 4477,2048.72 v1(4477,1963)
Sensor_SDA: U6.43 U9.3 | length 370
  Top Layer 1 w6: U6.43 4250.37,1957.63 4265,1943 4305,1943 4331,1917 4331,1844 4352,1823 4425,1823 U9.3@4455,1853
SWCLK: U6.37 U8.3 | length 352.4
  Top Layer 1 w6: U8.3@3915.38,2038.47 3893.99,2017.08 3893.99,1975.49 3905.01,1964.47 4115.53,1964.47 4132.26,1981.21 U6.37
SWDIO: U6.34 U8.2 | length 136.5
  Top Layer 1 w6: U8.2@3947.53,2095.47 3954.63,2102.58 U6.34
USART1_RXD: U6.31 U12.2 | length 602.7
  Top Layer 1 w6: U6.31 4334.53,2161.63 4344.73,2151.43 v2(4347.43,2151.43)
  Bottom Layer 1 w6: v2(4347.43,2151.43) 4394.09,2151.43 4487.52,2058 4619.49,2058 v2(4634.63,2042.86)
USART1_TXD: U6.30 U12.3 | length 603.8
  Top Layer 1 w6: U6.30 4081.24,2181.16 4346.39,2181.16 v2(4346.54,2181)
  Bottom Layer 1 w6: v2(4346.54,2181) 4402.42,2181 4507.42,2076 4618.55,2076 v2(4634.63,2092.08)
USART3_RXD: U6.22 U13.3 | length 278.8
  Top Layer 1 w6: U13.3 3944.81,2387.47 4160.53,2387.47 4171.63,2376.37 U6.22
USART3_TXD: U6.21 U13.2 | length 324.4
  Top Layer 1 w6: U13.2 3954.2,2427.3 3976.7,2427.3 4000.53,2403.47 4173.53,2403.47 4190.53,2386.47 4190.53,2331.7 U6.21
V3P3: C3.1 R1.1 U1.15 U1.16 U1.17
VM: C2.1 C15.2 C16.2 pad.4 U1.4 U1.11 U7.2 U10.4 U10.5
  other v1: 4001.53,1864.47 4001.53,1897.47 4730.53,2073.47 4765.53,2073.47 4730.53,2119.47 4765.53,2119.47
pads on no net: U1.19 U1.21 U2.4 U6.3 U6.4 U6.17 U6.25 U6.26 U6.27 U6.28 U6.29 U6.32 U6.33 U6.38 U6.39 U6.40 U6.41 U6.45 U6.46 U8.5 U8.6 U9.5 U9.6 U11.4 U11.5 U12.5 U12.6 U13.5 U13.6

## Polygon pours and split planes (outlines as drawn)
GND on Bottom Layer 1 "NONET_L-01_P-001" (solid, pour order 61): 3964,2629 3928,2593 3834,2593 3821,2606 3757,2606 3748,2615 3748,2713 3759,2724 4067,2724 4092,2749 4092,2806 4097,2811 4170,2811 4174,2807 4174,2665 4169,2660 4133,2660 4121,2648 4061,2648 4045,2664
3.3V on Bottom Layer 1 "NONET_L-01_P-001" (solid, pour order 57): 4522,2610 4583,2610 4596,2597 4596,2556 4607,2545 4696,2545 4702,2551 4702,2574 4697,2579 4651,2579 4619,2611 4619,2682 4597,2704 4534,2704 4530,2700 4530,2663 4523,2656 4459,2656 4448,2645 4448,2629
GND on Bottom Layer 1 "NONET_L-01_P-001" (solid, pour order 39): 4420,2257 4422,2255 4523,2255 4549,2229 4549,2104 4556,2097 4605,2097 4622,2114 4676,2114 4695,2133 4695,2369 4680,2384 4623,2384 4613,2374 4613,2244 4606,2237 4561,2237 4536,2262 4536,2393 4530,2399 4482,2399 4479,2396 4479,2313 4469,2303 4423,2303 4420,2300
VM on Bottom Layer 1 "NONET_L-01_P-001" (solid, pour order 19): 4723,2164 4776,2164 4785.53,2154.47 4785.53,1929.47 4758.53,1902.47 4616.53,1902.47 4589.53,1875.47 4589.53,1831.53 4578,1820 4412,1820 4397,1835 4397,1872 4434,1872 4449,1857 4498,1857 4505,1864 4505,1956 4514,1965 4667,1965 4713,2011 4713,2154
OUT1_CS on Bottom Layer 1 "NONET_L-01_P-001" (solid, pour order 8): 4353.47,1896.53 4344.53,1905.47 4228.53,1905.47 4206.53,1927.47 4206.53,2004.47 4205.53,2005.47 4195.53,2005.47 4194.53,2004.47 4194.53,1894.47 4201.53,1887.47 4255.53,1887.47 4278.53,1864.47 4278.53,1832.47 4284.53,1826.47 4350.47,1826.47 4353.47,1829.47
3.3V on Bottom Layer 1 "NONET_L-01_P-001" (solid, pour order 55): 4426.53,2517.47 4437.05,2528 4519,2528 4521,2530 4521,2600 4557.53,2636.53 4557.53,2656.47 4529.47,2656.47 4516,2643 4462,2643 4448,2629 4448,2581 4427,2560 4329,2560 4318,2571 4312,2565 4312,2501
3.3V on Bottom Layer 1 "NONET_L-01_P-001" (solid, pour order 54): 3867,2225 3869,2223 3883,2223 3886,2226 3886,2290 3883,2293 3868,2293 3867,2292
OUT2 on Bottom Layer 1 "NONET_L-01_P-001" (solid, pour order 49): 4148,1710 4151,1707 4215,1707 4220,1712 4220,1759 4215,1764 4150,1764 4148,1762
GND on Bottom Layer 1 "NONET_L-01_P-001" (solid, pour order 45): 3841,2460 3843,2462 3855,2462 3858,2459 3858,2410 3857,2409 3842,2409 3841,2410
5V on Bottom Layer 1 "NONET_L-01_P-001" (solid, pour order 30): 3962,2605 3962,2520 4073,2520 4073,2540 4078,2545 4198,2545 4205,2552 4205,2645 4202,2648 4137,2648 4135,2646 4135,2625 4137,2623 4183,2623 4191,2615 4191,2579 4184,2572 4119,2572 4113,2578 4059,2578 4054,2583 4054,2602 4047,2609 3966,2609
V3P3 on Bottom Layer 1 "NONET_L-01_P-001" (solid, pour order 44): 3964,2389 3970,2395 4013,2395 4019,2389 4019,2289 4028,2280 4028,2218 4026,2216 3966,2216 3964,2218
GND on Bottom Layer 1 "NONET_L-01_P-001" (solid, pour order 43): 4280,2606 4285,2601 4326,2601 4332,2595 4332,2578 4337,2573 4423,2573 4429,2579 4429,2668.95 4427.94,2670 4286,2670 4280,2664
GND on Bottom Layer 1 "NONET_L-01_P-001" (solid, pour order 42): 3750.63,2625 4058,2625 4066,2617 4066,2598 4078,2586 4177,2586 4178,2587 4178,2608 4176,2610 4126,2610 4121,2615 4121,2697 4114,2704 3750.63,2704
GND on Bottom Layer 1 "NONET_L-01_P-001" (solid, pour order 41): 4479,2396 4479,2507 4481,2509 4527,2509 4533,2503 4533,2393.16
GND on Bottom Layer 1 "NONET_L-01_P-001" (solid, pour order 38): 4297,2216 4282,2201 4294,2189 4327,2189 4327,2237 4310,2254 4310,2279 4307,2282 4298,2282 4297,2281
GND on Bottom Layer 1 "NONET_L-01_P-001" (solid, pour order 37): 3946,2103 3946,1998 3951,1993 4024,1993 4028,1997 4028,2061 4041,2074
5V on Bottom Layer 1 "NONET_L-01_P-001" (solid, pour order 31): 3954,2528 3962,2520 3962,2605 3937,2580 3870,2580 3861,2571 3861,2532 3865,2528
3.3V on Bottom Layer 1 "NONET_L-01_P-001" (solid, pour order 29): 4422.53,2473.47 4280.53,2473.47 4271.53,2482.47 4271.53,2533.47 4260.53,2544.47 4220.53,2544.47 4215.53,2549.47 4215.53,2586.47 4218.53,2589.47 4320.53,2589.47 4322.53,2587.47 4322.53,2538.47 4339.53,2521.47 4422.53,2521.47 4426.53,2517.47 4426.53,2477.47
VM on Bottom Layer 1 "NONET_L-01_P-001" (solid, pour order 28): 4053.53,2058.47 4052.53,2059.47 4041.53,2059.47 4040.53,2058.47 4040.53,1993.47 4029.05,1982 3978.05,1982 3973.53,1977.47 3973.53,1923.47 3988.53,1908.47 3988.53,1856.47 3992.53,1852.47 4010.53,1852.47 4013.53,1855.47 4013.53,1913.47 4028.53,1928.47 4047.53,1928.47 4053.53,1934.47
VM on Bottom Layer 1 "NONET_L-01_P-001" (solid, pour order 18): 4438,1933 4431.53,1939.47 4260.53,1939.47 4231.53,1968.47 4231.53,2059.47 4230.53,2060.47 4222.53,2060.47 4220.53,2058.47 4220.53,1932.47 4235,1918 4388,1918 4397,1909 4397,1835 4408.53,1823.47 4438,1823.47
GND on Bottom Layer 1 "NONET_L-01_P-001" (solid, pour order 11): 4180.53,2066.47 4189.53,2075.47 4135.53,2075.47 4143.53,2067.47 4143.53,1995.47 4146.53,1992.47 4177.53,1992.47 4180.53,1995.47
OUT3_CS on Bottom Layer 1 "NONET_L-01_P-001" (solid, pour order 10): 4103.53,2059.47 4092.53,2059.47 4091.53,2058.47 4091.53,1926.47 4079.53,1914.47 4030.53,1914.47 4024.53,1908.47 4024.53,1850.47 4025.53,1849.47 4100.53,1849.47 4104.53,1853.47 4104.53,1971.47 4104.53,2058.47
OUT2_CS on Bottom Layer 1 "NONET_L-01_P-001" (solid, pour order 9): 4216.53,1875.47 4215.53,1876.47 4161.53,1876.47 4129.53,1908.47 4129.53,2058.47 4128.53,2059.47 4118.53,2059.47 4117.53,2058.47 4117.53,1837.47 4126.53,1828.47 4215.53,1828.47 4216.53,1829.47
OSCOUT on Bottom Layer 1 "NONET_L-01_P-001" (solid, pour order 7): 4599.53,2388.47 4596.53,2391.47 4554.53,2391.47 4552.53,2389.47 4552.53,2260.47 4555.53,2257.47 4597.53,2257.47 4599.53,2259.47
OSCIN on Bottom Layer 1 "NONET_L-01_P-001" (solid, pour order 6): 4533.53,2228.47 4529.53,2232.47 4486.47,2232.47 4482,2228 4482,2102 4487.53,2096.47 4530.53,2096.47 4533.53,2099.47
OUT3 on Bottom Layer 1 "NONET_L-01_P-001" (solid, pour order 2): 4094.53,1779.47 4092.53,1781.47 4024.53,1781.47 4022.53,1779.47 4022.53,1736.47 4026.53,1732.47 4092.53,1732.47 4094.53,1734.47
OUT1 on Bottom Layer 1 "NONET_L-01_P-001" (solid, pour order 0): 4386.53,1761.47 4381.53,1766.47 4335.53,1766.47 4324.53,1755.47 4324.53,1713.47 4337.53,1700.47 4379.53,1700.47 4386.53,1707.47
GND on Top Layer 1 "NONET_L-01_P-001" (solid, pour order 60): 3958,2728 4077,2728 4083,2734 4083,2778 4088,2783 4168,2783 4177,2774 4177,2707 4161,2691 4083,2691 4072,2680 4072,2627 4063,2618 4026,2618 4020,2624 3922,2624
GND on Top Layer 1 "NONET_L-01_P-001" (solid, pour order 59): 3753,2590 3949,2590 3952,2593 3952,2609 3964,2621 3964,2723 3959,2728 3760,2728 3751,2719 3751,2592
3.3V on Top Layer 1 "NONET_L-01_P-001" (solid, pour order 58): 4343,2043 4343,2065 4347,2069 4510,2069 4524,2055 4524,2019 4520,2015 4494,2015 4488,2021 4488,2034 4483,2039 4440,2039 4419,2018
5V on Top Layer 1 "NONET_L-01_P-001" (solid, pour order 56): 4347,1844 4350,1841 4385,1841 4388,1844 4388,1915 4383,1920 4350,1920 4347,1917
GND on Top Layer 1 "NONET_L-01_P-001" (solid, pour order 53): 4124,2089 4127,2092 4127,2140 4132,2145 4213,2145 4217,2141 4217,2070 4214,2067 4130,2067 4127,2070 4127,2074 4124,2077 4046,2077 4045,2078 4045,2088 4046,2089
GND on Top Layer 1 "NONET_L-01_P-001" (solid, pour order 52): 3907,2012 3914,2019 4001,2019 4008,2026 4043,2026 4045,2024 4045,1986 4040,1981 3907,1981
3.3V on Top Layer 1 "NONET_L-01_P-001" (solid, pour order 51): 3760,2092 3765,2087 3824,2087 3831,2094 3831,2141 3838,2148 3894,2148 3900,2142 3900,2129 3903,2126 3987,2126 3993,2120 3993,2115 3994,2114 4031,2114 4032,2115 4032,2292 4039,2299 4118,2299 4122,2295 4135,2295 4138,2298 4138,2367 4135,2370 4117,2370 4114,2367 4114,2324 4106,2316 4054,2316 4049,2321 4049,2366 4045,2370 4016,2370 4011,2365 4011,2323 4000,2312 3876,2312 3868,2304 3868,2185 3860,2177 3768,2177 3760,2169
GND on Top Layer 1 "NONET_L-01_P-001" (solid, pour order 50): 4430,2015 4444,2029 4474,2029 4476,2027 4476,1991 4472,1987 4461,1987 4455,1981 4455,1968 4450,1963 4433,1963 4430,1966
3.3V on Top Layer 1 "NONET_L-01_P-001" (solid, pour order 47): 4348,1968 4376,1968 4385,1977 4414,1977 4421,1984 4421,2027.97 4400.97,2048 4348,2048 4343,2043 4343,1973
GND on Top Layer 1 "NONET_L-01_P-001" (solid, pour order 46): 3958,2618 4039,2618 4042,2621 4042,2671 4036,2677 3962,2677 3958,2673
GND on Top Layer 1 "NONET_L-01_P-001" (solid, pour order 36): 4413,2644 4415,2642 4553,2642 4565,2654 4565,2805 4559.53,2810.47 4496.47,2810.47 4493,2807 4493,2697 4490,2694 4415,2694 4413,2692
5V on Top Layer 1 "NONET_L-01_P-001" (solid, pour order 32): 3869,2528 3875,2522 3958,2522 3964,2528 3964,2559 3943,2580 3876,2580 3869,2573
GND on Top Layer 1 "NONET_L-01_P-001" (solid, pour order 26): 4350.53,2570.47 4354.53,2574.47 4393.53,2574.47 4395.53,2576.47 4395.53,2596.47 4394.53,2597.47 4328.53,2597.47 4326.53,2595.47 4326.53,2519.47 4327,2519 4350,2519 4350.53,2519.53
NetC11_2 on Top Layer 1 "NONET_L-01_P-001" (solid, pour order 25): 4313.53,2670.47 4304.53,2679.47 4093.53,2679.47 4089.53,2675.47 4089.53,2603.47 4094.53,2598.47 4309.53,2598.47 4313.53,2602.47
NetC11_1 on Top Layer 1 "NONET_L-01_P-001" (solid, pour order 24): 4313.53,2583.47 4308.53,2588.47 4242.53,2588.47 4240.53,2586.47 4240.53,2522.47 4244.53,2518.47 4312.53,2518.47 4313.53,2519.47
NetC12_2 on Top Layer 1 "NONET_L-01_P-001" (solid, pour order 23): 4511.53,2459.47 4510.53,2460.47 4452.53,2460.47 4442.53,2470.47 4371.53,2470.47 4352.53,2489.47 4352.53,2504.47 4348.53,2508.47 4211.53,2508.47 4201.53,2518.47 4201.53,2558.47 4193.53,2566.47 4061.53,2566.47 4055.53,2572.47 4055.53,2602.47 4051.53,2606.47 3964.53,2606.47 3961.53,2603.47 3961.53,2576.57 3965.63,2572.47 3989.53,2572.47 3995.53,2566.47 3995.53,2522.89 3998.41,2520 4069,2520 4081.53,2507.47 4081.53,2474.47 4087.53,2468.47 4285.53,2468.47 4295.53,2458.47 4352.53,2458.47 4360,2451 4360,2443 4386.53,2416.47 4510.53,2416.47 4511.53,2417.47
NetC14_1 on Top Layer 1 "NONET_L-01_P-001" (solid, pour order 22): 4578.53,2504.47 4577.53,2505.47 4408.53,2505.47 4395.53,2518.47 4395.53,2561.47 4393.53,2563.47 4364.53,2563.47 4363.53,2562.47 4363.53,2499.47 4381.53,2481.47 4451.53,2481.47 4461.53,2471.47 4577.53,2471.47 4578.53,2472.47
VM on Top Layer 1 "NONET_L-01_P-001" (solid, pour order 21): 4623.53,2523.47 4592.53,2554.47 4519.53,2554.47 4507.53,2566.47 4507.53,2625.47 4501.53,2631.47 4405.53,2631.47 4400.53,2636.47 4400.53,2662.47 4396.53,2666.47 4327.53,2666.47 4325.53,2664.47 4325.53,2622.47 4339.53,2608.47 4403.53,2608.47 4411.53,2600.47 4411.53,2530.47 4422.53,2519.47 4585.53,2519.47 4596.53,2508.47 4596.53,2459.47 4604.53,2451.47 4624.53,2451.47 4633.53,2460.47 4633.53,2523.47
VM on Top Layer 1 "NONET_L-01_P-001" (solid, pour order 15): 4617.53,2517.47 4617.53,2456.47 4622.53,2451.47 4819.53,2451.47 4825.53,2457.47 4825.53,2517.47 4819.53,2523.47 4623.53,2523.47
GND on Top Layer 1 "NONET_L-01_P-001" (solid, pour order 14): 4617.53,2369.47 4617.53,2305.47 4621.53,2301.47 4821.53,2301.47 4825.53,2305.47 4825.53,2370.47 4822.53,2373.47 4621.53,2373.47
OUT1 on Top Layer 1 "NONET_L-01_P-001" (solid, pour order 5): 4386.53,1708.47 4386.53,1801.47 4380.53,1807.47 4344.53,1807.47 4320.53,1831.47 4223.53,1831.47 4209.53,1845.47 4209.53,1904.47 4196.53,1917.47 4140.53,1917.47 4136.53,1913.47 4136.53,1827.79 4157.84,1806.47 4316.53,1806.47 4324.53,1798.47 4324.53,1708.47 4330.53,1702.47 4380.53,1702.47
OUT2 on Top Layer 1 "NONET_L-01_P-001" (solid, pour order 4): 4192.53,1778.47 4180.53,1790.47 4135.53,1790.47 4114.53,1811.47 4114.53,1914.47 4112.53,1916.47 4089.53,1916.47 4087.53,1914.47 4087.53,1800.47 4108.53,1779.47 4108.53,1714.47 4124.53,1698.47 4186.53,1698.47 4192.53,1704.47
OUT3 on Top Layer 1 "NONET_L-01_P-001" (solid, pour order 3): 4094.53,1779.47 4065.53,1808.47 4065.53,1914.47 4062.53,1917.47 4040.53,1917.47 4037.53,1914.47 4037.53,1807.47 4014.53,1784.47 4014.53,1728.47 4024.53,1718.47 4088.53,1718.47 4094.53,1724.47
VM on Top Solder "NONET_L-01_P-001" (solid, pour order 12): 4825.53,2307.47 4825.53,2368.47 4820.53,2373.47 4623.53,2373.47 4617.53,2367.47 4617.53,2307.47 4623.53,2301.47 4819.53,2301.47
GND on Top Solder "NONET_L-01_P-001" (solid, pour order 13): 4825.53,2455.47 4825.53,2519.47 4821.53,2523.47 4621.53,2523.47 4617.53,2519.47 4617.53,2454.47 4620.53,2451.47 4821.53,2451.47
VM on Bottom Layer "NONET_L-01_P-001" (solid, pour order 34): 4517,2233 4536,2214 4660,2214 4676,2198 4676,2533 4672,2537 4530,2537 4517,2524 4517,2523
3.3V on Bottom Layer "NONET_L-01_P-001" (solid, remove dead copper, pour order 63): 3750.62,2728.77 cw(c3832.33,2728.77) 3832.33,2810.47 4743.72,2810.47 cw(c4743.72,2728.77) 4825.43,2728.77 4825.43,1774.69 cw(c4743.72,1774.69) 4743.72,1692.99 3832.33,1692.99 cw(c3832.33,1774.69) 3750.63,1774.69
+1.65V on Bottom Layer "NONET_L-01_P-001" (solid, pour order 33): 3795,2163 3813,2145 3813,2051 3817,2047 3831,2047 3836,2052 3836,2444 3832,2448 3798,2448 3795,2445
VM on Bottom Layer "NONET_L-01_P-001" (solid, pour order 27): 4814,2537 4672,2537 4672,1981 4660,1969 4520.05,1969 4479.53,1928.47 3969.53,1928.47 3957.53,1916.47 3957.53,1824.47 3978.53,1803.47 4585.47,1803.47 4601.53,1819.53 4601.53,1858.53 4648,1905 4802,1905 4825.43,1928.43 4825.43,2525.57
GND on Top Layer "NONET_L-01_P-001" (solid, pour order 35): 3750.62,2728.77 cw(c3832.33,2728.77) 3832.33,2810.47 4743.72,2810.47 cw(c4743.72,2728.77) 4825.43,2728.77 4825.43,1774.69 cw(c4743.72,1774.69) 4743.72,1692.99 3832.33,1692.99 cw(c3832.33,1774.69) 3750.63,1774.69

## Silkscreen, mask and mechanical layers (free items; w line width, h text height)
Top Overlay:
  text "C" at 3977.89,2723.67 h40
  text "A" at 3775.26,2723.19 h40
  text "B" at 3876.85,2723.19 h40
  text "RES" at 4650.85,2633.2 h40
  text "＋" at 4778.55,2602.98 h40
  text "3.3V" at 3982.65,2476.63 h36
  text "TX3" at 3987.25,2426.48 h40
  text "Simple FOC" at 4150.21,2397.49 h40
  text "RX3" at 3987.25,2385.18 h40
  text "3.3V" at 3946.31,2233.36 h40
  text "DIO" at 3956.31,2196.64 h36
  text "CLK" at 3956.31,2163.94 h30
  text "GND" at 4509.36,2129.61 h40
  text "TX1" at 4526.12,2087.69 h40
  text "RX1" at 4519.46,2037.77 h40
  text "3.3V" at 4509.47,1979.36 h40
  text "C" at 4040.19,1934.19 h40
  text "B" at 4089.02,1934.19 h40
  text "A" at 4137.99,1934.19 h40
  text "5V" at 4280.99,1926.68 h40
  text "SCL" at 4338.67,1926.2 h40
  text "SDA" at 4418.6,1926.2 h40
  text "GND" at 4501.78,1926.2 h40
Bottom Overlay:
  circle w10: c4655,2243 r39.05
  circle w10: c3800.53,2567.47 r39.05
  circle w10: c4557.53,2656.47 r39.05
  text "5V" at 3810.71,2618.69 h36
  text "3.3V" at 4519.35,2608.13 h36
  text "By:LPBOSS" at 4389.82,2361.73 h40
  text "GND" at 4686.12,2163.77 h36
Mechanical 1:
  the board outline again, w10